# Altium PCB PCB2.PcbDoc
Units mm, origin at the board's own origin, x right, y up, seen from the top; angles counter-clockwise.
Board outline 114.81 x 80.26 mm, 2 copper layers (Top Layer, Bottom Layer); 33 components, 51 nets, 170 pads, 27 vias.
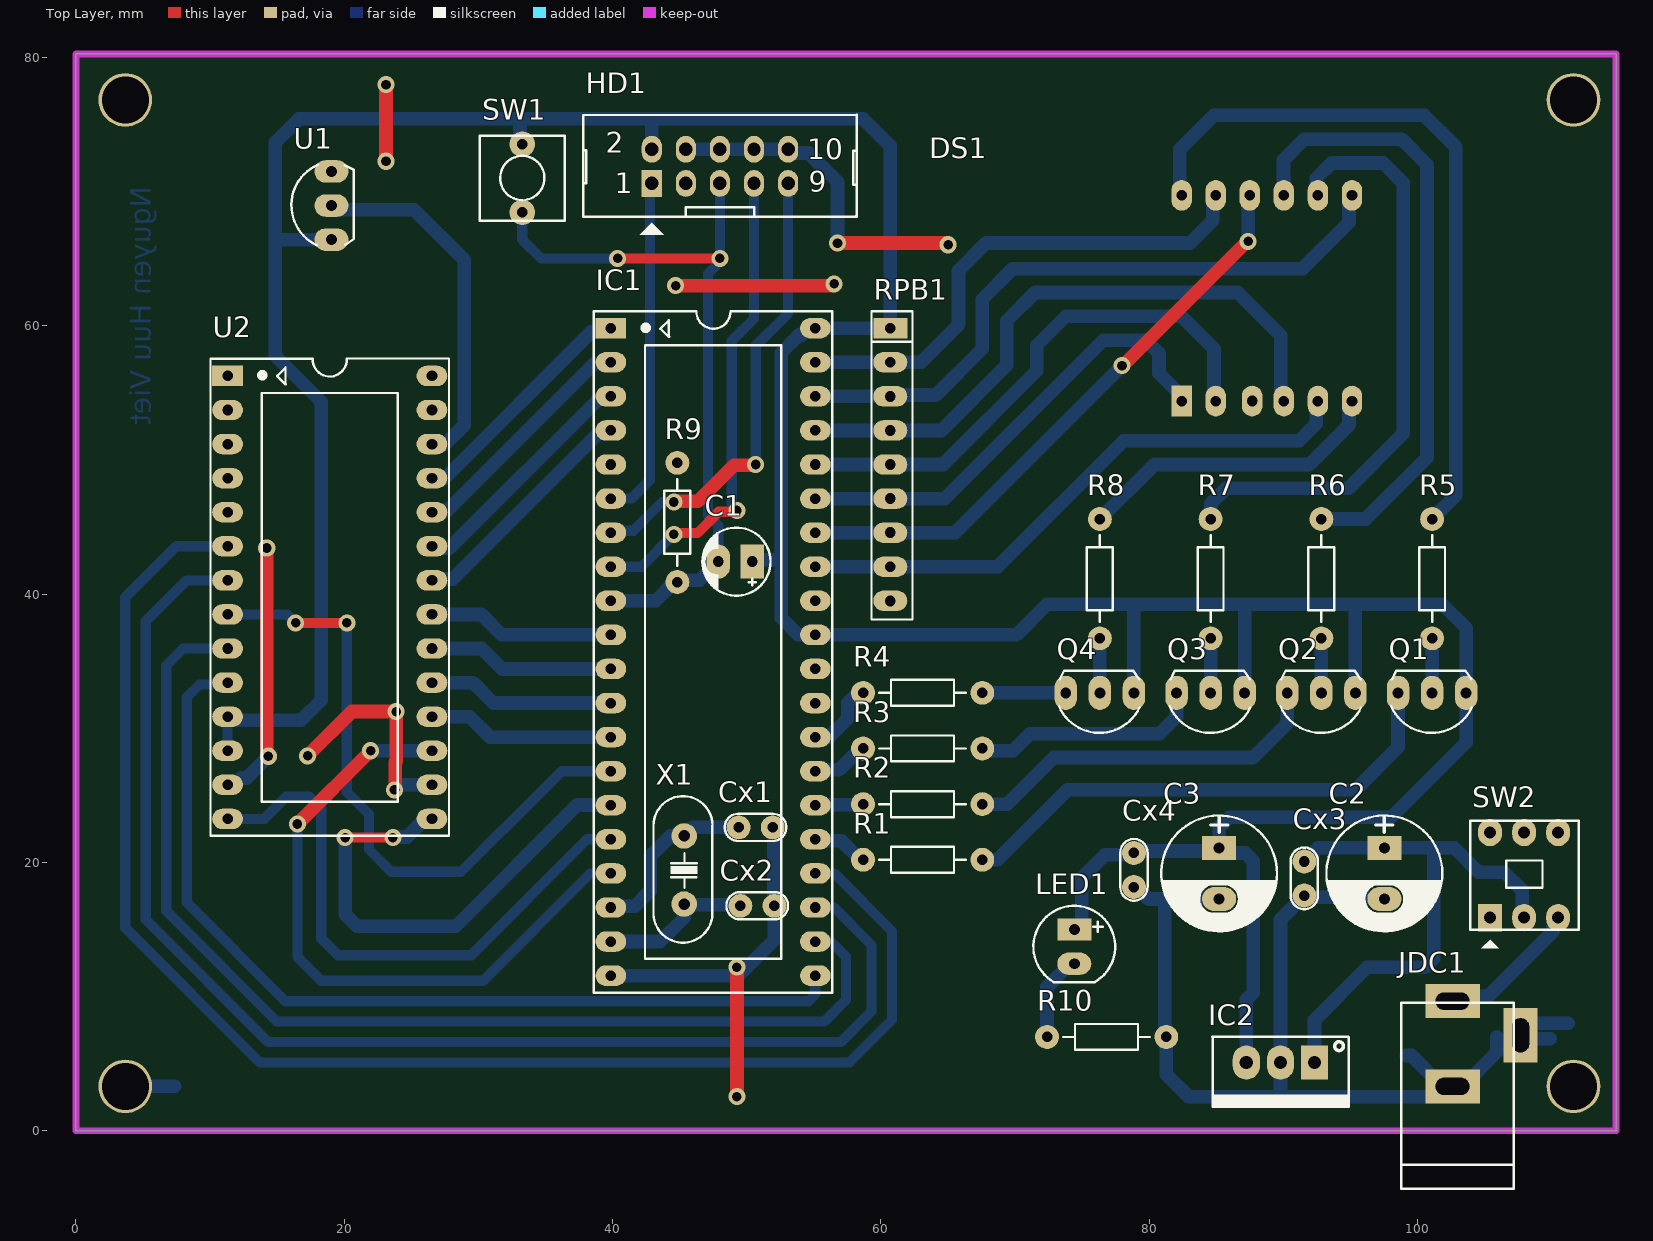
[diagram p0: Top Layer view]
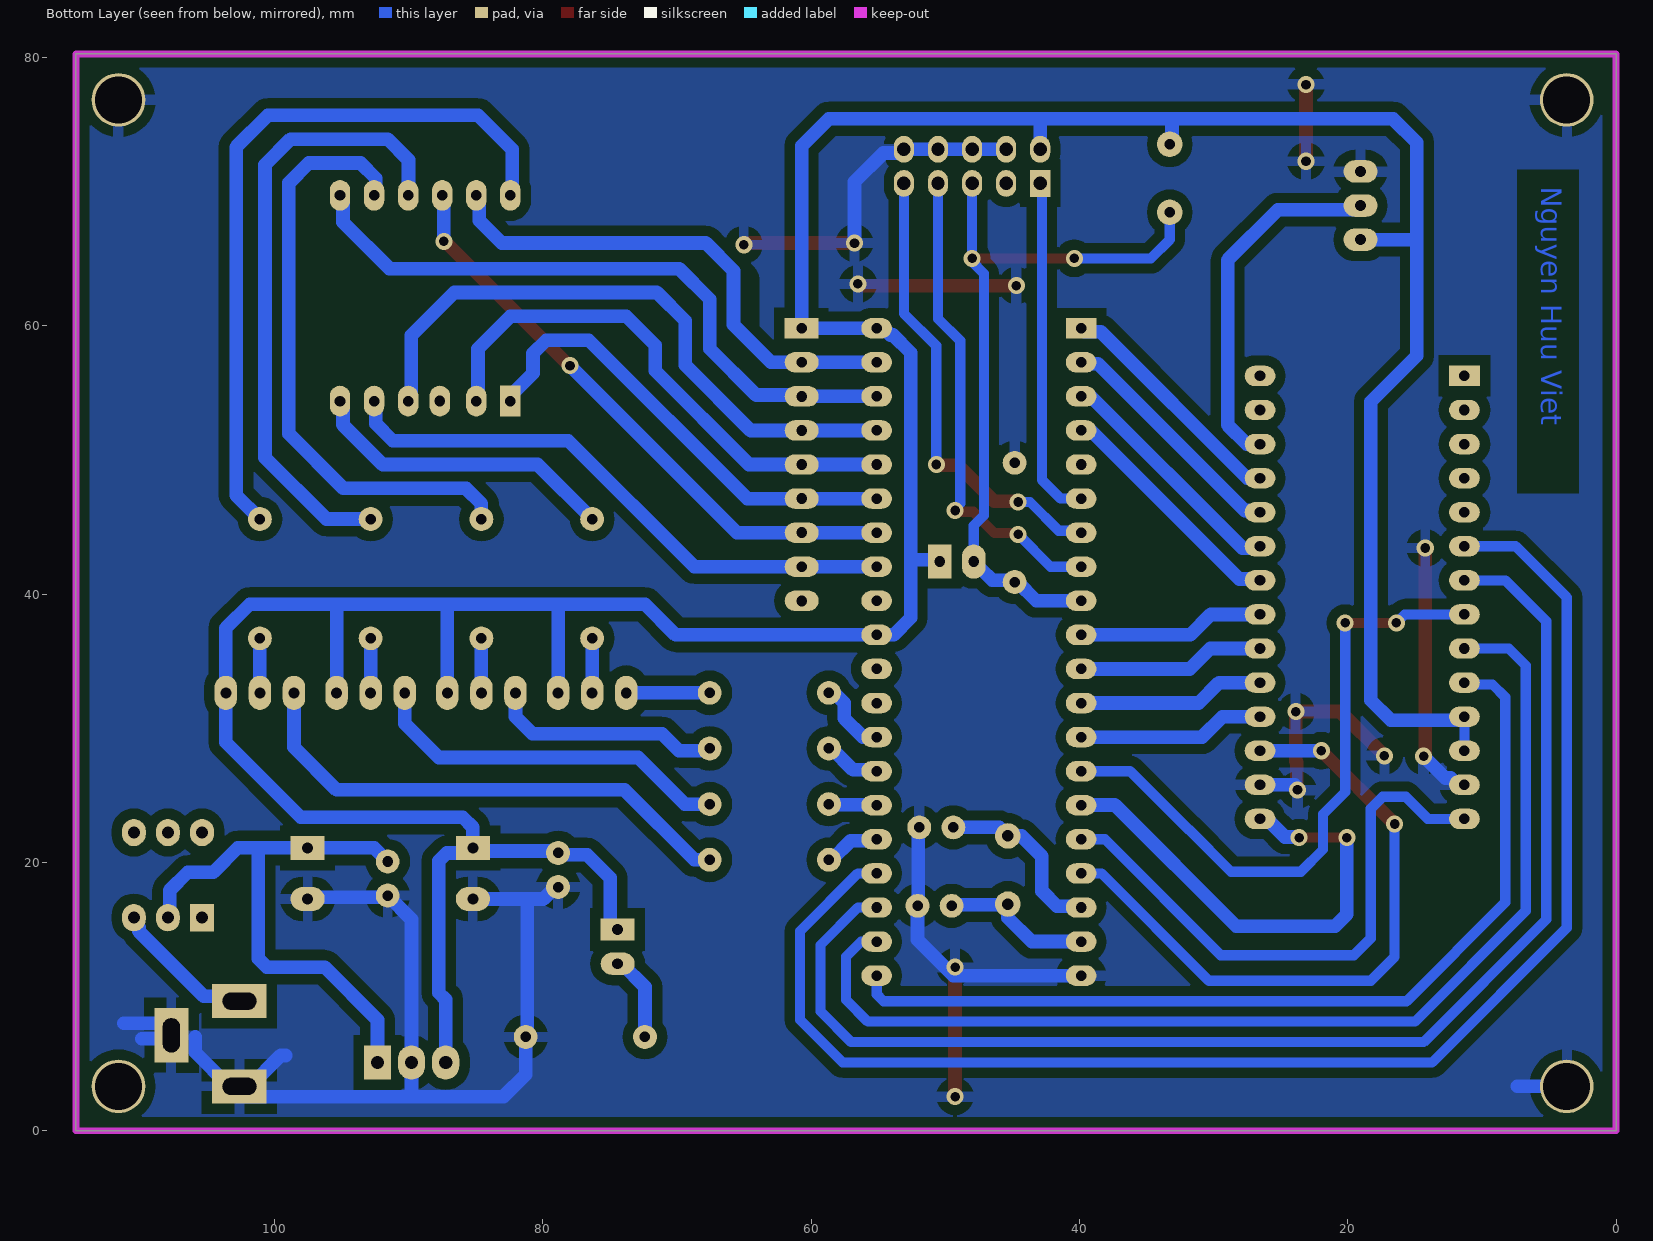
[diagram p1: Bottom Layer view, seen from below]

## Layer stack, top to bottom
Top Solder: solder mask 0.0102, Solder Resist, Dk 3.5
Top Layer: signal copper 0.0356
Dielectric 1: dielectric 0.32, FR-4, Dk 4.8
Bottom Layer: signal copper 0.0356
Bottom Solder: solder mask 0.0102, Solder Resist, Dk 3.5

## Board outline
0,0 114.808,0 114.808,80.264 0,80.264

## Design rules (kind name [scope] priority, off if disabled: settings)
Clearance [All] p1: gap=0.762 ignorepadtopadclearanceinfootprint=FALSE
PolygonConnect [All] p1: connectstyle=Relief reliefconductorwidth=0.762 reliefentries=4 polygonreliefangle="90 Angle" airgapwidth=0.762
RoutingVias [All] p1: holewidth=0.711 width=1.27 viastyle="Through Hole" minholewidth=0.711 minwidth=1.27 maxholewidth=0.711 maxwidth=1.27
SolderMaskExpansion [All] p1: expansion=0.102
Width [All] p1: maxlimit=1.016 minlimit=0.381 preferedwidth=0.762
30 further rules are at their usual default settings.

## Classes and differential pairs
component class Sheet1: C1 C2 C3 Cx1 Cx2 Cx3 Cx4 DS1 HD1 IC1 IC2 JDC1 LED1 Q1 Q2 Q3 Q4 R2 R5 R8 R10 RPB1 SW1 SW2 U1 U2 X1

## Components (designator, comment, footprint, x,y, rotation, side; value= is the part's Value field where it differs from the comment)
C1 "10uF" CP1/2 50.419,42.418 r180 top value=10uF/50V
C2 "1000uF/16V" CP1.5/3.4 97.536,21.082 r270 top
C3 "1000uF/16V" CP1.5/3.4 85.217,21.082 r270 top
Cx1 "33pF" CN1#1 51.943,22.606 r180 top
Cx2 "33pF" CN1#1 52.07,16.764 r180 top
Cx3 "104" CN1#2 91.567,18.796 r90 top value=33pF
Cx4 "104" CN1#2 78.867,19.431 r90 top value=33pF
DS1 "7SEGQ" LED7SEG-4-0.36 87.677,54.723 r0 top value="LED 7Q SEG"
HD1 "Header 5x2" Hed2X5 42.926,70.612 r0 top
IC1 "AT89S52" DIP40/W0.6 39.878,59.817 r270 top
IC2 "LM7805" QTO-220 92.329,5.08 r180 top
JDC1 "Jac DC" DC-IN 105.156,6.477 r90 top
LED1 "LED" LED-5-RED 74.422,14.986 r270 top value="LED 3 ly Single Colour"
Q1 "A1015" QTO-92 101.092,32.639 r180 top
Q2 "A1015" QTO-92 92.837,32.639 r180 top
Q3 "A1015" QTO-92 84.582,32.639 r180 top
Q4 "A1015" QTO-92 76.327,32.639 r180 top
R1 "Res1" R1/4W 67.564,20.193 r180 top value=330
R2 "Res1" R1/4W 67.564,24.342 r180 top value=330
R3 "Res1" R1/4W 67.564,28.49 r180 top value=330
R4 "Res1" R1/4W 67.564,32.639 r180 top value=330
R5 "Res1" R1/4W 101.092,45.593 r270 top value=330
R6 "Res1" R1/4W 92.837,45.593 r270 top value=330
R7 "Res1" R1/4W 84.582,45.593 r270 top value=330
R8 "Res1" R1/4W 76.327,45.593 r270 top value=330
R9 "Res1" R1/4W 44.831,40.894 r90 top value=10K
R10 "Res1" R1/4W 81.28,6.985 r180 top value=1K
RPB1 "10K" RN8 60.706,59.817 r270 top value="Tro thanh 10K"
SW1 "SW" SW2 33.274,73.533 r270 top value="SW chip 2 pin"
SW2 "SW6S" SW6 105.41,15.875 r90 top value=SW6
U1 "LM35" QTO-92 19.05,68.961 r90 top
U2 "ADC0809CCN" DIP28/W0.6 18.796,39.751 r270 top
X1 "12Mhz" XT2 45.339,19.431 r90 top value=4Mhz

## Footprints (in the part's own frame and the unit in brackets; to place one, negate y for a bottom-side part, rotate by r counter-clockwise, add the part's x,y. Pads: shape width x height; smd on the part's side, far side on the other; paste and mask are expansions set on the pad)
CN1#1 [mil]
  round 70 hole 31: 1(0,0) 2(100,0)
  silkscreen extent -40,-40 141,40, body extent -60,-30 170,37, height 265
CN1#2 [mil]
  round 70 hole 31: 1(-50,0) 2(50,0)
  silkscreen extent -90,-40 91,40, body extent -115,-33 115,33, height 265
CP1.5/3.4 [mil] "Tu hoa 220->470uF,16V, 470uF/16V,25V"
  rect 70x100 hole 32: 1(0,0)
  oval 70x100 hole 32: 2(150,0)
  silkscreen extent -95,-170 245,170, body extent -85,-157 230,157, height 446
CP1/2 [mil] "Tu hoa < 22uF/16>50V"
  rect 70x100 hole 32: 1(0,0)
  oval 70x100 hole 32: 2(100,0)
  silkscreen extent -53,-100 147,100, body extent -49,-99 149,99, height 287
DC-IN [mil] "Jac DC input"
  rect 100x160 hole 50 slot 100 at 90 deg: 1(125,100) 2(-125,100)
  rect 160x100 hole 50 slot 100 at 0 deg: 3(25,-100)
  silkscreen extent -425,-80 120,250, body extent -410,-105 134,269, height 434
DIP28/W0.6 [mil] "DIP28/W.600, Pin to pin 100mil"
  rect 60x90 hole 31: 1(-650,-295)
  oval 60x90 hole 31: 2(-550,-295) 3(-450,-295) 4(-350,-295) 5(-250,-295) 6(-150,-295) 7(-50,-295) 8(50,-295) 9(150,-295) 10(250,-295) 11(350,-295) 12(450,-295) 13(550,-295) 14(650,-295) 15(650,305) 16(550,305) 17(450,305) 18(350,305) 19(250,305) 20(150,305) 21(50,305) 22(-50,305) 23(-150,305) 24(-250,305) 25(-350,305) 26(-450,305) 27(-550,305) 28(-650,305)
  silkscreen extent -701,-345 700,355, body extent -734,-295 734,315, height 224
DIP40/W0.6 [mil] "40 PIN, W 600mil, Pin to pin 100mil"
  rect 60x90 hole 31: 1(0,0)
  oval 60x90 hole 31: 2(100,0) 3(200,0) 4(300,0) 5(400,0) 6(500,0) 7(600,0) 8(700,0) 9(800,0) 10(900,0) 11(1000,0) 12(1100,0) 13(1200,0) 14(1300,0) 15(1400,0) 16(1500,0) 17(1600,0) 18(1700,0) 19(1800,0) 20(1900,0) 21(1900,600) 22(1800,600) 23(1700,600) 24(1600,600) 25(1500,600) 26(1400,600) 27(1300,600) 28(1200,600) 29(1100,600) 30(1000,600) 31(900,600) 32(800,600) 33(700,600) 34(600,600) 35(500,600) 36(400,600) 37(300,600) 38(200,600) 39(100,600) 40(0,600)
  silkscreen extent -50,-50 1950,650, body extent -82,-10 1982,600, height 224
Hed2X5 [mm] "Header 10x2,20 pin, connecter"
  rect 1.5x2 hole 1: 1(0,0)
  oval 1.5x2 hole 1: 2(0,2.54) 3(2.54,0) 4(2.54,2.54) 5(5.08,0) 6(5.08,2.54) 7(7.62,0) 8(7.62,2.54) 9(10.16,0) 10(10.16,2.54)
  silkscreen extent -5.1,-3.81 15.29,5.11, body extent -5.17,-3.33 15.33,5.97, height 8.82
LED7SEG-4-0.36 [mil]
  rect 60x90 hole 31: 1(-206.85,-13.15)
  oval 60x90 hole 31: 2(-106.85,-13.15) 3(0,-13.14) 4(93.15,-13.15) 5(193.15,-13.15) 6(293.15,-13.15) 7(293.15,590.55) 8(193.15,590.55) 9(93.15,590.55) 10(-6.85,590.55) 11(-106.85,590.55) 12(-206.85,590.55)
  body extent -958,-79 1026,669, height 669
LED-5-RED [mil] "LED 2 PIN, 5 ly , Only colour,pin to pin 100mil"
  rect 65x100 hole 32: 1(0,0)
  oval 65x100 hole 32: 2(100,0)
  silkscreen extent -70,-120 154,120, body extent -65,-119 149,118, height 339
QTO-92 [mil] "TO-92"
  oval 66x100 hole 32: 1(-100,0) 2(0,0) 3(100,0)
  silkscreen extent -117,-65 120,118, body extent -109,-66 109,95, height 245
QTO-220 [mil] "TO-220 - 1-2-3"
  rect 80x100 hole 39: 1(0,0)
  oval 80x100 hole 39: 2(100,0) 3(200,0)
  silkscreen extent -100,-76 300,130, body extent -119,-64 322,121, height 755
R1/4W [mil] "R 1/4W, 2 Pin, 350mil"
  round 70 hole 31: 1(0,0) 2(350,0)
  silkscreen extent 48,-38 302,38, body extent -40,-47 386,47, height 111
RN8 [mil] "R SIP8, 9 Pin"
  rect 60x100 hole 32: 1(0,0)
  oval 60x100 hole 32: 2(100,0) 3(200,0) 4(300,0) 5(400,0) 6(500,0) 7(600,0) 8(700,0) 9(800,0)
  silkscreen extent -50,-55 855,65, body extent -43,-20 843,29, height 219
SW2 [mil] "SW button 2pin, 250x 250 mil"
  round 75 hole 31: 1(0,0) 2(200,0)
  silkscreen extent -25,-125 225,125
SW6 [mil] "SW DTDP - 6Pin 260x300x300 mil"
  rect 80x70 hole 35: 1(0,0)
  oval 80x70 hole 35: 2(0,-100) 3(0,-200) 4(250,-200) 5(250,-100) 6(250,0)
  silkscreen extent -90,-260 285,58, body extent -33,-259 281,55, height 532
XT2 [mil] "Footpin for Crystal 2 pin"
  round 75 hole 34: 1(-100,0) 2(100,0)
  silkscreen extent -213,-83 217,90, body extent -216,-87 216,90, height 144

## Part data
C1: library part "Cap 0,1uF->22uF", "Cap P  0,1uF < 22uF , 16 - 50V", Description 1="10 => 220uF/6,3V/10V - 10uF => 100uF/16V", Description 2="0,1uF => 33uF/50V - 10uF => 22uF/63V", Description 3="0,47uF => 10uF/100V"
C2 C3: library part CP4, "Cap 1000uF/16V - 220uF/50V", Description 1="2200uF-3300uF/6,3V - 1000uF-2200uF/10V", Description 2="1000uF/16V - 470uF => 1000uF/25V - 100uF/100V", Description 3=330uF>470uF/35V_220uF>470uF/50V_10uF>22uF/250V, Description 4="220uF => 330uF/63V - 10uF =>33uF/160 - 200V", Description 5="4,7uF>10uF/250V_3,3uF>10uF/400V - 2,2uF>4,7uF/450V"
Cx1 Cx2: library part CN0, "Cremic For Xtal 1pF => 100pF"
Cx3 Cx4: library part CN
DS1: library part LED7SEG-4, "Four 7 Seg Dipslay"
HD1: library part HED5x2
IC1: "AT89S52, 8k Byte Flash Memory , 40 Pin"
IC2: library part LM78xx, "On ap +, from + 5 to + 24VDC", =LM7808
JDC1: library part DCIN, "Jac DC input"
LED1: "LED Single colour Green and Red"
Q1 Q2 Q3 Q4: "PNP 600mW, ECB", =A1013
R1 R2 R3 R4 R5 R6 R7 R8 R9 R10: library part Res1_4, "Resistor", Manufacturer="Generic Components", Class=Passive, Published=08/06/2000, Publisher="Altium Hobart Technology Centre", SubClass=Resistor
RPB1: library part RN8, "Resistor 8 (Thanh)"
SW1: library part SW2, "Switch button 2 pin"
SW2: "SW-DTDP - 6 Pin"
U1: "Teminal"
U2: "8-bit Microprocessor Compatible A/D Converters With 8-Channel Multiplexer", DigiKeyPartNumber=ADC0809CCN-ND, Manufacturer="National Semiconductor", PackageTopMarking=NSUZXYYTTE#*ADC0809CCN, ComponentLink1Description="ADC0809 Datasheet", ComponentLink1URL=http://www.national.com/ds/AD/ADC0809.pdf, ComponentLink2Description="ADC0809 Web Page", ComponentLink2URL=http://www.national.com/pf/AD/ADC0809.html, ComponentLink3Description="NA28E Package Page", ComponentLink3URL=http://www.national.com/packaging/folders/na28e.html, CompType="ADC IC", DatasheetVersion=Sep-1992, PackageDescription="Molded Dip, 28 Lead, .600 Centers, Substractor Package", PackageReference=NA28E, PackageVersion="revB, Aug-1993", PartNumber=ADC0809CCN, PinCount=28, Published=27-Nov-2008, Publisher="Altium Limited", RoHS=O
X1: library part XT2, "Crystal, 32.768 KHz, -40 to 85 degC, 3.2 x 1.5 x 0.9 mm SMD"

## Free pads (board coordinates)
  round 4 hole 3.5: 2(111.633,76.835) 3(3.683,76.835) 4(3.683,3.302) 4(111.633,3.302)

## Via types
v1: diameter 1.27, hole 0.711, Top Layer to Bottom Layer, 27 vias

## Nets (pads, with @x,y where several pads share a name; then routed paths per layer and width w, separated by ;. In a path a pad name is that pad's centre, name@x,y a point inside that pad or via, vN(x,y) a via of type N, cw(c..) or ccw(c..) an arc to the next point about the centre after c; other vN are vias at no path point)
A0: IC1.1 U2.25 | length 18
  Bottom Layer w1.016: U2.25 27.5,48.641 38.422,59.563 39.624,59.563 IC1.1
A1: IC1.2 U2.24 | length 18
  Bottom Layer w1.016: U2.24 27.335,46.101 27.462,46.228 27.686,46.228 38.638,57.18 39.781,57.18 IC1.2
A2: IC1.3 U2.23 | length 18.1
  Bottom Layer w1.016: U2.23 27.061,43.561 27.198,43.424 27.85,43.424 39.163,54.737 IC1.3
ALE: IC1.4 U2.22 | length 18
  Bottom Layer w1.016: U2.22 26.64,41.118 28.085,41.118 39.163,52.197 IC1.4
CLOCK: IC1.21 U2.10 | length 70.3
  Bottom Layer w0.762: U2.10 11.157,33.255 9.209,33.255 8.255,32.301 8.255,17.014 15.617,9.652 54.61,9.652 55.118,10.16 IC1.21
CTR_0: IC1.28 R4.2 | length 5.6
  Bottom Layer w1.016: IC1.28 56.134,29.337 57.531,30.734 57.531,31.877 58.293,32.639 R4.2
CTR_1: IC1.27 R3.2 | length 4.3
  Bottom Layer w1.016: IC1.27 55.215,26.894 56.872,26.894 58.468,28.49 R3.2
CTR_2: IC1.26 R2.2 | length 3.6
  Bottom Layer w1.016: IC1.26 55.16,24.299 58.632,24.299 R2.2
CTR_3: IC1.25 R1.2 | length 4.2
  Bottom Layer w1.016: IC1.25 55.215,21.62 57.041,21.62 58.468,20.193 R1.2
DT_A: DS1.11 IC1.39 RPB1.2 | length 38.3
  Bottom Layer w1.016: IC1.39 RPB1.2 62.992,57.277 65.786,60.071 65.786,64.108 67.845,66.167 83.058,66.167 84.739,67.848 84.739,69.626 DS1.11@84.836,69.723
DT_B: DS1.7 IC1.38 RPB1.3 | length 49.4
  Bottom Layer w1.016: IC1.38 RPB1.3 60.803,54.834 64.105,54.834 67.564,58.293 67.564,61.976 69.85,64.262 91.44,64.262 94.899,67.721 94.899,69.626 DS1.7@94.996,69.723
DT_C: DS1.4 IC1.37 RPB1.4 | length 47.2
  Bottom Layer w1.016: IC1.37 RPB1.4 64.516,52.197 69.393,57.074 69.393,60.376 71.501,62.484 86.614,62.484 89.819,59.279 89.819,54.486 DS1.4@89.916,54.389
DT_D: DS1.2 IC1.36 RPB1.5 | length 40.3
  Bottom Layer w1.016: IC1.36 RPB1.5 64.643,49.657 71.628,56.642 71.628,58.547 73.787,60.706 82.423,60.706 84.836,58.293 DS1.2@84.836,54.389
DT_E: DS1.1 IC1.35 RPB1.6 | length 35.1
  Bottom Layer w1.016: IC1.35 RPB1.6 64.77,47.117 76.581,58.928 79.756,58.928 80.732,57.952 80.732,56.461 82.296,54.897 DS1.1@82.296,54.389
DT_F: DS1.10 IC1.34 RPB1.7 | length 44.7
  Top Layer w1.016: v1(77.978,57.023) 78.041,57.023 87.312,66.294 v1(87.376,66.294)
  Bottom Layer w1.016: IC1.34 RPB1.7 65.532,44.577 v1(77.978,57.023) ; v1(87.376,66.294) DS1.10@87.376,69.723
DT_G: DS1.5 IC1.33 RPB1.8 | length 43.4
  Bottom Layer w1.016: IC1.33 RPB1.8 68.707,42.037 78.105,51.435 91.186,51.435 92.456,52.705 DS1.5@92.456,54.389
EOC: IC1.23 U2.7 | length 98.7
  Bottom Layer w0.762: U2.7 8.255,41.021 5.207,37.973 5.207,15.744 14.347,6.604 57.023,6.604 59.309,8.89 59.309,13.843 56.515,16.637 IC1.23
GND: C2.2 C3.2 Cx1.1 Cx2.1 Cx3.1 Cx4.1 HD1.4 HD1.6 HD1.8 HD1.10 IC1.20 IC2.2 JDC1.2 JDC1.3 pad.2 pad.3 pad.4@3.683,3.302 R9.2 R10.1 U1.3 U2.13 U2.16 | length 194.3
  Top Layer w1.016: v1(14.224,43.434) 14.224,28.106 14.351,27.979 v1(14.351,27.911) ; v1(17.272,27.94) 20.574,31.242 v1(23.876,31.242) 23.876,27.532 23.798,27.454 23.798,25.449 v1(23.749,25.4) ; v1(23.114,72.263) v1(23.114,77.978) ; v1(44.704,62.992) 56.319,62.992 56.446,63.119 v1(56.515,63.119) ; v1(49.276,2.54) v1(49.276,12.192) ; v1(56.769,66.167) 64.828,66.167 64.955,66.04 v1(65.024,66.04)
  Bottom Layer w1.016: pad.4@3.683,3.302 7.366,3.302 ; U2.13 11.821,25.781 12.329,26.289 12.729,26.289 v1(14.351,27.911) ; v1@23.94,25.781 U2.16 ; IC1.20 49.403,11.557 52.07,14.224 Cx2.1 52.006,16.828 52.006,22.543 Cx1.1 ; HD1.4 HD1.6 HD1.8 HD1.10 53.086,73.106 53.31,72.882 54.616,72.882 56.769,70.729 v1(56.769,66.167) ; Cx4.1 79.073,18.161 79.962,17.272 81.153,17.272 ; C3.2 81.153,17.272 ; C2.2 97.409,17.399 91.694,17.399 Cx3.1 89.789,15.748 IC2.2 89.789,2.54 ; 99.187,5.606 99.55,5.606 101.854,3.302 JDC1.2 103.378,3.302 105.918,5.842 105.918,6.985 ; JDC1.2@103.124,2.921 102.743,2.54 89.789,2.54 ; 109.898,6.858 107.95,6.858 JDC1.3 107.696,7.239 108.458,8.001 111.252,8.001 ; 81.153,17.272 81.153,7.112 R10.1 81.28,4.191 82.931,2.54 89.789,2.54
MISO: HD1.9 IC1.7 | length 34.9
  Top Layer w1.016: v1(44.577,46.863) 44.626,46.912 46.365,46.912 49.062,49.608 50.624,49.608 v1(50.673,49.657)
  Bottom Layer w0.762: IC1.7 40.024,44.723 41.548,44.723 43.688,46.863 v1(44.577,46.863) ; v1(50.673,49.657) 50.673,58.502 53.086,60.915 HD1.9
MOSI: HD1.1 IC1.6 | length 25.7
  Bottom Layer w0.762: IC1.6 41.402,47.117 42.799,48.514 42.799,70.485 HD1.1
NetC2_1: C2.1 Cx3.2 IC2.1 SW2.2 | length 42.3
  Bottom Layer w1.016: Cx3.2 92.583,21.082 C2.1 101.219,21.082 ; IC2.1 IC2.1@92.456,5.207 ; IC2.1@92.329,5.207 92.329,8.255 96.266,12.192 100.584,12.192 101.219,12.827 101.219,21.082 ; SW2.2 107.823,16.002 107.823,17.907 106.466,19.264 104.561,19.264 102.743,21.082 101.219,21.082
NetDS1_6: DS1.6 R8.1 | length 23.3
  Bottom Layer w1.016: R8.1 80.391,49.657 91.948,49.657 94.899,52.608 94.899,54.292 DS1.6@94.996,54.389
NetDS1_8: DS1.8 R7.1 | length 45.2
  Bottom Layer w1.016: R7.1 84.582,46.736 85.725,47.879 94.869,47.879 98.933,51.943 98.933,70.652 97.449,72.136 93.599,72.136 92.456,70.993 DS1.8@92.456,69.723
NetDS1_9: DS1.9 R6.1 | length 46.4
  Bottom Layer w1.016: DS1.9@89.916,69.723 90.013,69.82 90.013,72.36 91.567,73.914 98.806,73.914 100.711,72.009 100.711,50.165 96.139,45.593 R6.1
NetDS1_12: DS1.12 R5.1 | length 54.5
  Bottom Layer w1.016: DS1.12@82.296,69.723 82.296,73.152 84.836,75.692 100.497,75.692 102.87,73.319 102.87,47.371 R5.1
NetJDC1_1: JDC1.1 SW2.3 | length 10.5
  Bottom Layer w1.016: JDC1.1@103.124,9.271 103.886,10.033 105.288,10.033 110.109,14.854 110.109,15.161 110.49,15.542 SW2.3
NetLED1_2: LED1.2 R10.2 | length 6.5
  Bottom Layer w1.016: R10.2 72.39,10.711 74.125,12.446 LED1.2
NetQ1_2: Q1.2 R5.2 | length 4.1
  Bottom Layer w1.016: Q1.2 R5.2
NetQ1_3: Q1.3 R1.1 | length 38.5
  Bottom Layer w1.016: R1.1 68.707,20.193 73.914,25.4 95.377,25.4 98.552,28.575 Q1.3
NetQ2_2: Q2.2 R6.2 | length 4.1
  Bottom Layer w1.016: Q2.2 R6.2
NetQ2_3: Q2.3 R2.1 | length 27.5
  Bottom Layer w1.016: R2.1 69.427,24.342 72.898,27.813 87.757,27.813 90.297,30.353 Q2.3
NetQ3_2: Q3.2 R7.2 | length 4.1
  Bottom Layer w1.016: Q3.2 R7.2
NetQ3_3: Q3.3 R3.1 | length 17.4
  Bottom Layer w1.016: R3.1 67.733,28.321 69.85,28.321 71.12,29.591 80.772,29.591 82.042,30.861 Q3.3
NetQ4_2: Q4.2 R8.2 | length 4.1
  Bottom Layer w1.016: Q4.2 R8.2
NetQ4_3: Q4.3 R4.1 | length 6.2
  Bottom Layer w1.016: R4.1 Q4.3
NetU1_2: U1.2 U2.26 | length 26.9
  Bottom Layer w1.016: U1.2 19.364,68.647 25.206,68.647 28.956,64.897 28.956,52.611 27.526,51.181 U2.26
OE: IC1.22 U2.9 | length 84.1
  Bottom Layer w0.762: U2.9 8.001,35.941 6.731,34.671 6.731,16.383 14.986,8.128 55.771,8.128 57.404,9.761 57.404,12.961 56.268,14.097 IC1.22
OUT1: IC1.10 U2.21 | length 14
  Bottom Layer w1.016: U2.21 30.226,38.481 31.75,36.957 IC1.10
OUT2: IC1.11 U2.20 | length 13.8
  Bottom Layer w1.016: U2.20 30.099,35.941 ; 30.252,35.941 31.776,34.417 IC1.11
OUT3: IC1.12 U2.19 | length 14
  Bottom Layer w1.016: U2.19 29.591,33.401 31.115,31.877 IC1.12
OUT4: IC1.13 U2.18 | length 14
  Bottom Layer w1.016: U2.18 29.341,30.861 30.865,29.337 IC1.13
OUT5: IC1.14 U2.8 | length 48.5
  Top Layer w0.762: v1(16.383,37.846) v1(20.193,37.846)
  Bottom Layer w0.762: U2.8 15.748,38.481 v1(16.383,37.846) ; v1(20.193,37.846) 20.193,25.247 21.844,23.596 21.844,20.955 23.495,19.304 28.709,19.304 31.868,22.462 31.894,22.462 36.229,26.797 IC1.14
OUT6: IC1.15 U2.15 | length 36.7
  Top Layer w0.762: v1(20.066,21.844) v1(23.622,21.844)
  Bottom Layer w1.016: v1(20.066,21.844) 20.066,16.129 20.955,15.24 28.321,15.24 37.359,24.278 39.857,24.278 IC1.15 ; v1(23.622,21.844) 23.671,21.893 24.676,21.893 26.025,23.241 U2.15
OUT7: IC1.16 U2.14 | length 43.4
  Bottom Layer w0.762: U2.14 14.034,23.241 15.685,24.892 17.399,24.892 18.288,24.003 18.288,14.351 19.558,13.081 29.464,13.081 38.1,21.717 IC1.16
OUT8: IC1.17 U2.17 | length 49.6
  Top Layer w1.016: v1(16.51,22.86) v1(21.971,28.321)
  Bottom Layer w0.762: v1(16.51,22.86) 16.51,12.954 18.288,11.176 30.353,11.176 38.354,19.177 IC1.17
  Bottom Layer w1.016: v1(21.971,28.321) U2.17
RST: C1.2 HD1.5 IC1.9 R9.1 SW1.2 | length 54.7
  Top Layer w0.762: v1(40.386,65.024) v1(48.006,65.024)
  Bottom Layer w0.762: SW1.2 33.274,66.421 34.671,65.024 v1(40.386,65.024) ; C1.2 47.879,45.111 47.117,45.873 47.117,63.871 48.006,64.76 v1(48.006,65.024) HD1.5
  Bottom Layer w1.016: IC1.9 43.228,39.497 44.625,40.894 R9.1 44.977,41.04 46.501,41.04 C1.2@47.352,41.891
SCK: HD1.7 IC1.8 | length 36.4
  Top Layer w0.762: v1(44.577,44.45) 44.674,44.547 46.336,44.547 47.919,46.131 49.179,46.131 v1(49.276,46.228)
  Bottom Layer w0.762: IC1.8 42.164,42.037 v1(44.577,44.45) ; v1(49.276,46.228) 49.276,46.365 48.895,46.746 48.895,58.88 50.546,60.531 HD1.7
START: IC1.24 U2.6 | length 110.6
  Bottom Layer w0.762: U2.6 7.493,43.561 3.683,39.751 3.683,15.113 13.716,5.08 57.654,5.08 60.833,8.259 60.833,14.859 56.515,19.177 IC1.24
VCC: C1.1 C3.1 Cx4.2 HD1.2 IC1.31 IC1.40 IC2.3 LED1.1 Q1.1 Q2.1 Q3.1 Q4.1 RPB1.1 SW1.1 U1.1 U2.11 U2.12 | length 291.4
  Bottom Layer w0.762: U2.12 11.303,30.48 U2.11
  Bottom Layer w1.016: U2.11@11.303,30.48 11.43,30.607 16.804,30.607 18.288,32.091 18.288,54.337 14.859,57.766 14.859,66.167 ; U1.1 15.113,66.421 14.859,66.167 ; SW1.1 33.104,73.703 33.104,75.338 ; HD1.2 42.926,75.422 ; C1.1 50.546,42.545 52.578,42.545 ; LED1.1 74.671,14.986 74.988,15.303 74.988,18.854 76.689,20.555 78.721,20.555 Cx4.2 79.013,20.847 84.982,20.847 C3.1 ; Q4.1 78.867,39.116 78.74,39.243 ; Q3.1 87.122,39.116 86.995,39.243 ; IC2.3 87.249,9.779 87.757,10.287 87.757,20.106 87.162,20.701 85.598,20.701 C3.1 ; Q2.1 95.377,39.116 95.25,39.243 ; 14.859,66.167 14.859,73.66 16.621,75.422 33.02,75.422 33.104,75.338 ; 33.104,75.338 33.188,75.422 42.926,75.422 ; 42.926,75.422 58.69,75.422 60.706,73.406 RPB1.1 IC1.40 54.6,59.817 54.092,59.309 53.895,59.309 52.578,57.992 52.578,42.545 ; 52.578,42.545 52.578,38.227 53.848,36.957 IC1.31 70.104,36.957 72.39,39.243 78.74,39.243 ; 78.74,39.243 86.995,39.243 ; C3.1 85.217,22.606 85.979,23.368 98.044,23.368 103.632,28.956 Q1.1 103.632,37.465 101.854,39.243 95.25,39.243 ; 86.995,39.243 95.25,39.243
XTAL1: Cx1.2 IC1.18 X1.2 | length 13.5
  Bottom Layer w1.016: IC1.18 39.975,16.734 41.674,16.734 42.799,17.859 42.799,20.447 44.323,21.971 X1.2 45.974,22.606 Cx1.2
XTAL2: Cx2.2 IC1.19 X1.1 | length 11.5
  Bottom Layer w1.016: IC1.19 43.561,14.097 45.339,15.875 X1.1 45.402,16.828 49.466,16.828 Cx2.2
pads on no net: DS1.3 HD1.3 IC1.5 IC1.29 IC1.30 IC1.32 RPB1.9 SW2.1 SW2.4 SW2.5 SW2.6 U2.1 U2.2 U2.3 U2.4 U2.5 U2.27 U2.28

## Polygon pours and split planes (outlines as drawn)
GND on Bottom Layer "Bottom Layer-GND 1" (solid, remove dead copper, pour order 34): 0,80.01 0.254,80.264 114.554,80.264 114.554,0.381 114.427,0.254 -0.127,0.254 -0.127,79.756 0,79.883
no net on Bottom Layer "Bottom Layer-No Net 1" (solid, remove dead copper, pour order 32): 16.764,90.932
GND on Bottom Layer "Bottom Layer-GND" (solid, remove dead copper, pour order 2): 0.127,83.947
GND on Top Layer "Top Layer-GND" (solid, remove dead copper, pour order 30): 22.352,40.259

## Keep-outs
Keep-Out Layer:
  the board outline again, w0.508

## Other copper
Bottom Layer:
  text "Nguyen Huu Viet" at 5.588,70.358 h1.52 r90

## Text inside footprints (layer, text, board x,y; h text height)
HD1: Top Overlay "10" at 54.508,72.415 h1.52; Top Overlay "9" at 54.635,70.002 h1.52; Top Overlay "2" at 39.497,72.898 h1.52; Top Overlay "1" at 40.151,69.862 h1.52